# EAGLE board max232 (EAGLE 7.5.0)
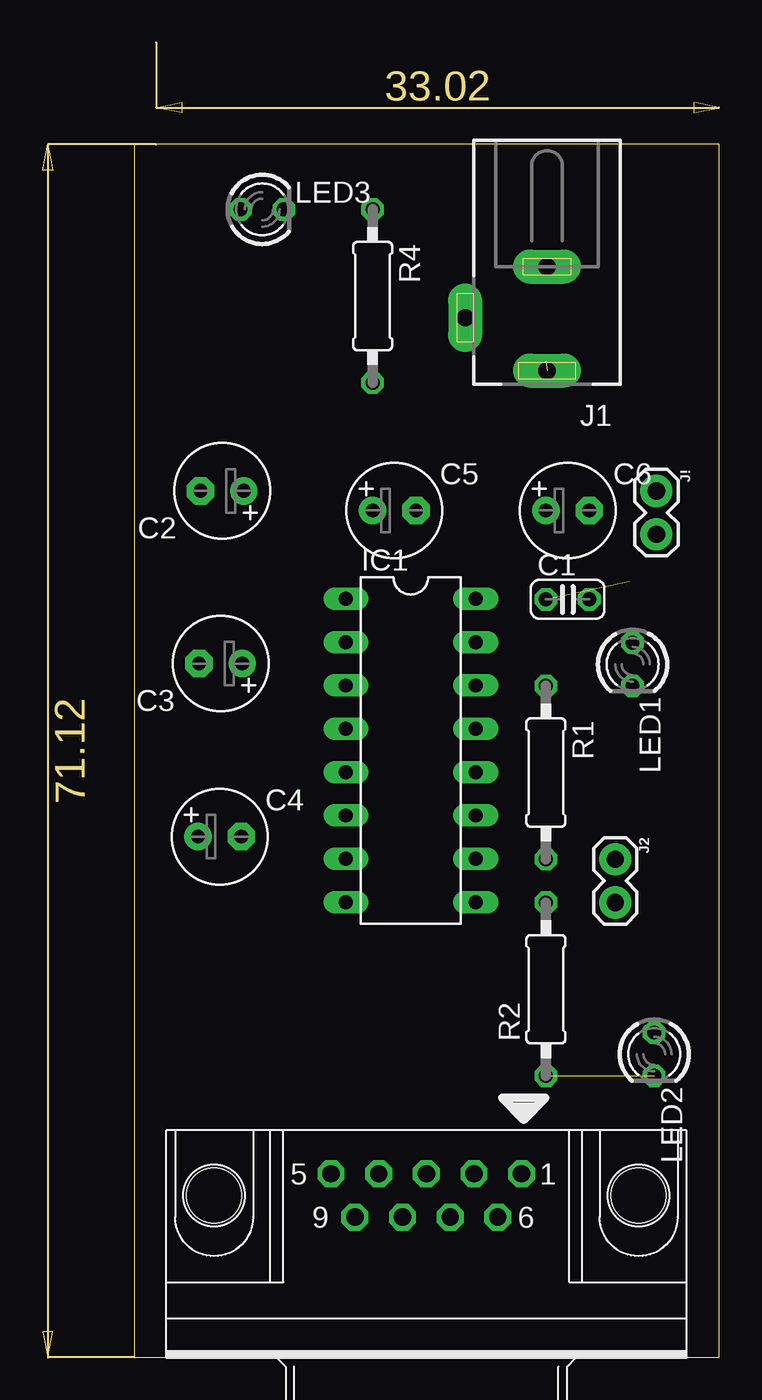
[diagram p0: board, top side]
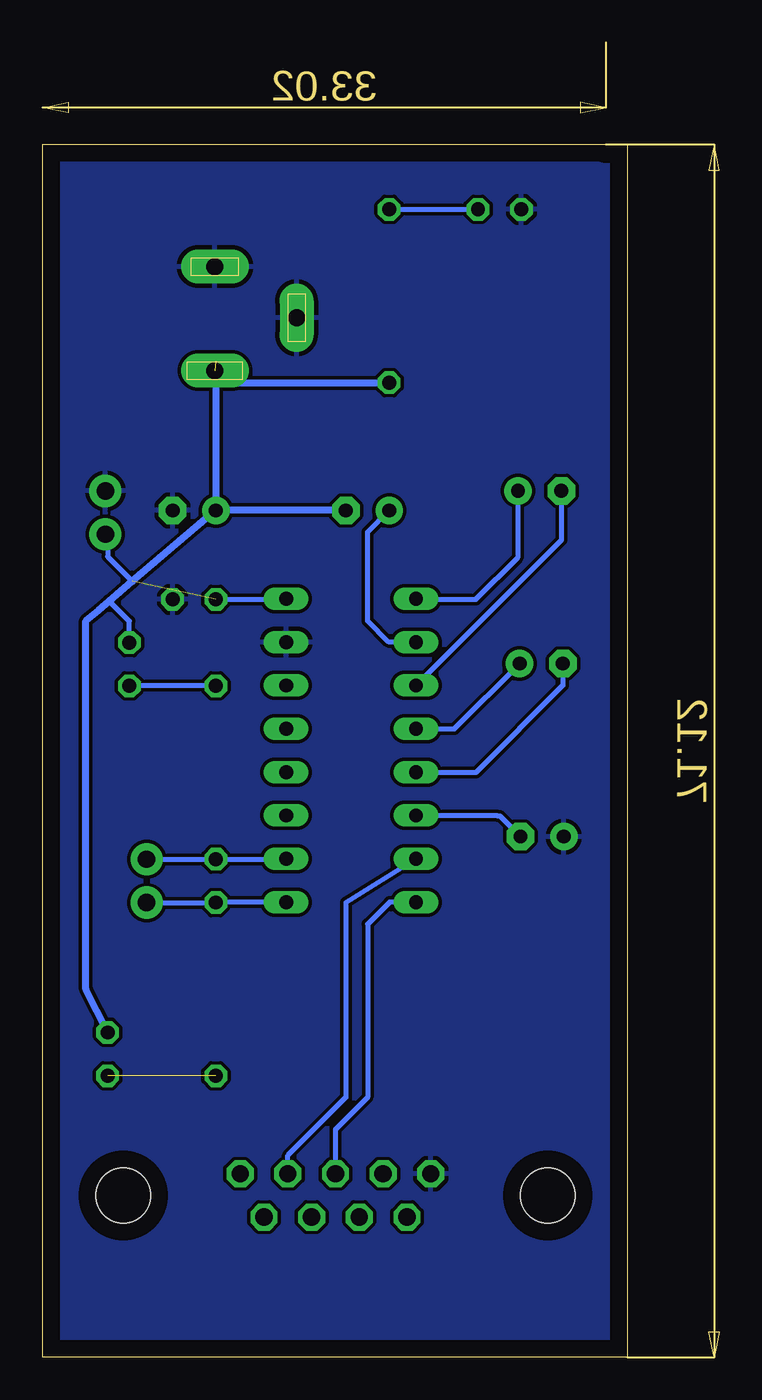
[diagram p1: board, bottom side, seen from below]

Size 34.29 x 71.12 mm. Coordinates in mm from the lower left corner, seen from the top.
Outline: 34.29,71.12 0,71.12 0,0 34.29,0 34.29,71.12
Copper layers (1*16): Top 0.035mm / dielectric 1.5mm / Bottom 0.035mm
Design rules "default": minimum track width 10mil, minimum drill 24mil, track to track 8mil, track to pad 8mil, pad to pad 8mil, via to via 8mil, smd to smd 8mil, copper to edge 40mil, drill to drill 8mil, minimum pad ring 10mil, minimum via ring 8mil, stop-mask expansion 4mil, vias tented up to drill 0mil, thermal gap 10mil

## Footprints (pad centres in the part's own frame; a part is rotated, then mirrored left to right if it is on the bottom)
C025-024X044 = drill 0.813 octagon: 1 -1.27,0; 2 1.27,0
E2,5-6 = drill 0.813 pad 1.6: + -1.27,0 | drill 0.813 pad 1.6 octagon: - 1.27,0
D-09F/90 = drill 1.016 pad 1.575 octagon: 1 -5.588,-1.27; 2 -2.794,-1.27; 3 0,-1.27; 4 2.794,-1.27; 5 5.588,-1.27; 6 -4.191,1.27; 7 -1.397,1.27; 8 1.397,1.27; 9 4.191,1.27 | hole 3.2: 12.446,0; -12.446,0
DIL16 = drill 0.813 long: 1 -8.89,-3.81; 2 -6.35,-3.81; 3 -3.81,-3.81; 4 -1.27,-3.81; 5 1.27,-3.81; 6 3.81,-3.81; 7 6.35,-3.81; 8 8.89,-3.81; 9 8.89,3.81; 10 6.35,3.81; 11 3.81,3.81; 12 1.27,3.81; 13 -1.27,3.81; 14 -3.81,3.81; 15 -6.35,3.81; 16 -8.89,3.81
DCJ0202 = drill 1 pad 2 long: 1 0,3.1; 2 4.8,0; 3 0,-3
1X02 = drill 1.016 pad 1.88: 1 0,0; 2 2.54,0
LED3MM = drill 0.813 octagon: A -1.27,0; K 1.27,0
0207/10 = drill 0.813 octagon: 1 -5.08,0; 2 5.08,0

## Placement (x,y rotation side)
C1  100nf  [C025-024X044]  25.4,44.45 0 top
C2  1uf / 25v  [E2,5-6]  5.14,50.81 180 top
C3  1uf /25v  [E2,5-6]  5.05,40.68 180 top
C4  1uf /25v  [E2,5-6]  5,30.54 0 top
C5  1uf /25v  [E2,5-6]  15.24,49.66 0 top
C6  4.7uf  [E2,5-6]  25.4,49.66 0 top
CON1  FEMALE  [D-09F/90]  17.12,9.49 180 top
IC1  MAX232  [DIL16]  16.21,35.59 270 top
J1  DCJ0202  [DCJ0202]  24.19,60.96 180 top
J2  FEMALE  [1X02]  28.19,29.21 270 top
J!  female  [1X02]  30.61,50.8 270 top
LED1  red  [LED3MM]  29.21,40.64 270 top
LED2  green  [LED3MM]  30.48,17.78 270 top
LED3  red  [LED3MM]  7.49,67.31 0 top
R1  220 /0.25w  [0207/10]  24.13,34.29 270 top
R2  220 / 0.25 w  [0207/10]  24.13,21.59 90 top
R4  220  [0207/10]  13.97,62.23 270 top

## Library data of the parts
C1-C6 CON1 J2 J! LED1-LED3 R1 R2 R4 = untitled
IC1 = untitled; MF: MAXIM; MPN: MAX232ACPE+; OC_FARNELL: 9723773; OC_NEWARK: 68K4544
J1 = untitled; OC_FARNELL: unknown; OC_NEWARK: unknown

## Nets
FAMEL: CON1.3 IC1.8
GND: C1.2 C4.+ C6.- CON1.5 IC1.15 J1.2 J1.3 J!.1 LED3.A
N$1: C2.+ IC1.1
N$2: C2.- IC1.3
N$3: C3.+ IC1.4
N$4: C3.- IC1.5
N$5: C5.+ IC1.2
N$6: C4.- IC1.6
N$7: CON1.2 IC1.7
N$8: LED1.K R1.1
N$11: LED2.K R2.1
N$15: LED3.K R4.1
RX: IC1.9 J2.2 R2.2
TX: IC1.10 J2.1 R1.2
VCC: C1.1 C5.- C6.+ IC1.16 J1.1 J!.2 LED1.A LED2.A R4.2

## Tracks (layer width: path | path; a pad name or v marks a point on that pad's centre or on a via)
FAMEL
  Bottom 0.305: IC1.8 13.94,26.7 15.24,25.4 15.24,15.24 17.12,13.36 CON1.3
GND
  pour Bottom: 0,71.12 34.29,71.12 34.29,0 0,0
N$1
  Bottom 0.305: IC1.1 12.37,44.45 8.89,44.45 6.41,46.93 C2.+
N$2
  Bottom 0.305: C2.- 3.87,47.92 IC1.3
N$3
  Bottom 0.305: IC1.4 10.15,36.85 C3.+
N$4
  Bottom 0.305: C3.- 3.79,39.39 8.89,34.29 12.37,34.29 IC1.5
N$5
  Bottom 0.305: IC1.2 14,41.93 15.24,43.18 15.24,48.39 C5.+
N$6
  Bottom 0.305: IC1.6 7.64,31.78 7.62,31.75 7.48,31.75 C4.-
N$7
  Bottom 0.305: IC1.7 16.51,26.67 16.51,15.24 19.91,11.84 CON1.2
N$8
  Bottom 0.305: R1.1 LED1.K
N$11  (1 unrouted)
N$15
  Bottom 0.305: R4.1 LED3.K
RX
  Bottom 0.305: IC1.9 24.11,26.7 R2.2 J2.2
TX
  Bottom 0.305: IC1.10 20.04,29.21 R1.2 J2.1
VCC  (2 unrouted)
  Bottom 0.305: 24.11,44.47 C1.1 20.04,44.45 IC1.16 | J!.2 30.48,48.26 30.48,46.96 29.02,45.5 | LED1.A 29.21,43.18 29.23,43.18 30.39,44.34
  Bottom 0.406: 24.13,58.42 C6.+ | J1.1 23.48,57.15 R4.2 | LED2.A 31.75,21.59 31.75,43.18 31.01,43.81 30.39,44.34 29.02,45.5 C6.+ | C5.- C6.+